# Altium PCB carte.PcbDoc
Units mm, origin at the board's own origin, x right, y up, seen from the top; angles counter-clockwise.
Board outline 100 x 72 mm, 2 copper layers (Top Layer, Bottom Layer); 52 components, 29 nets, 111 pads, 0 vias.
Unrouted connection lines stored in the file: 53.
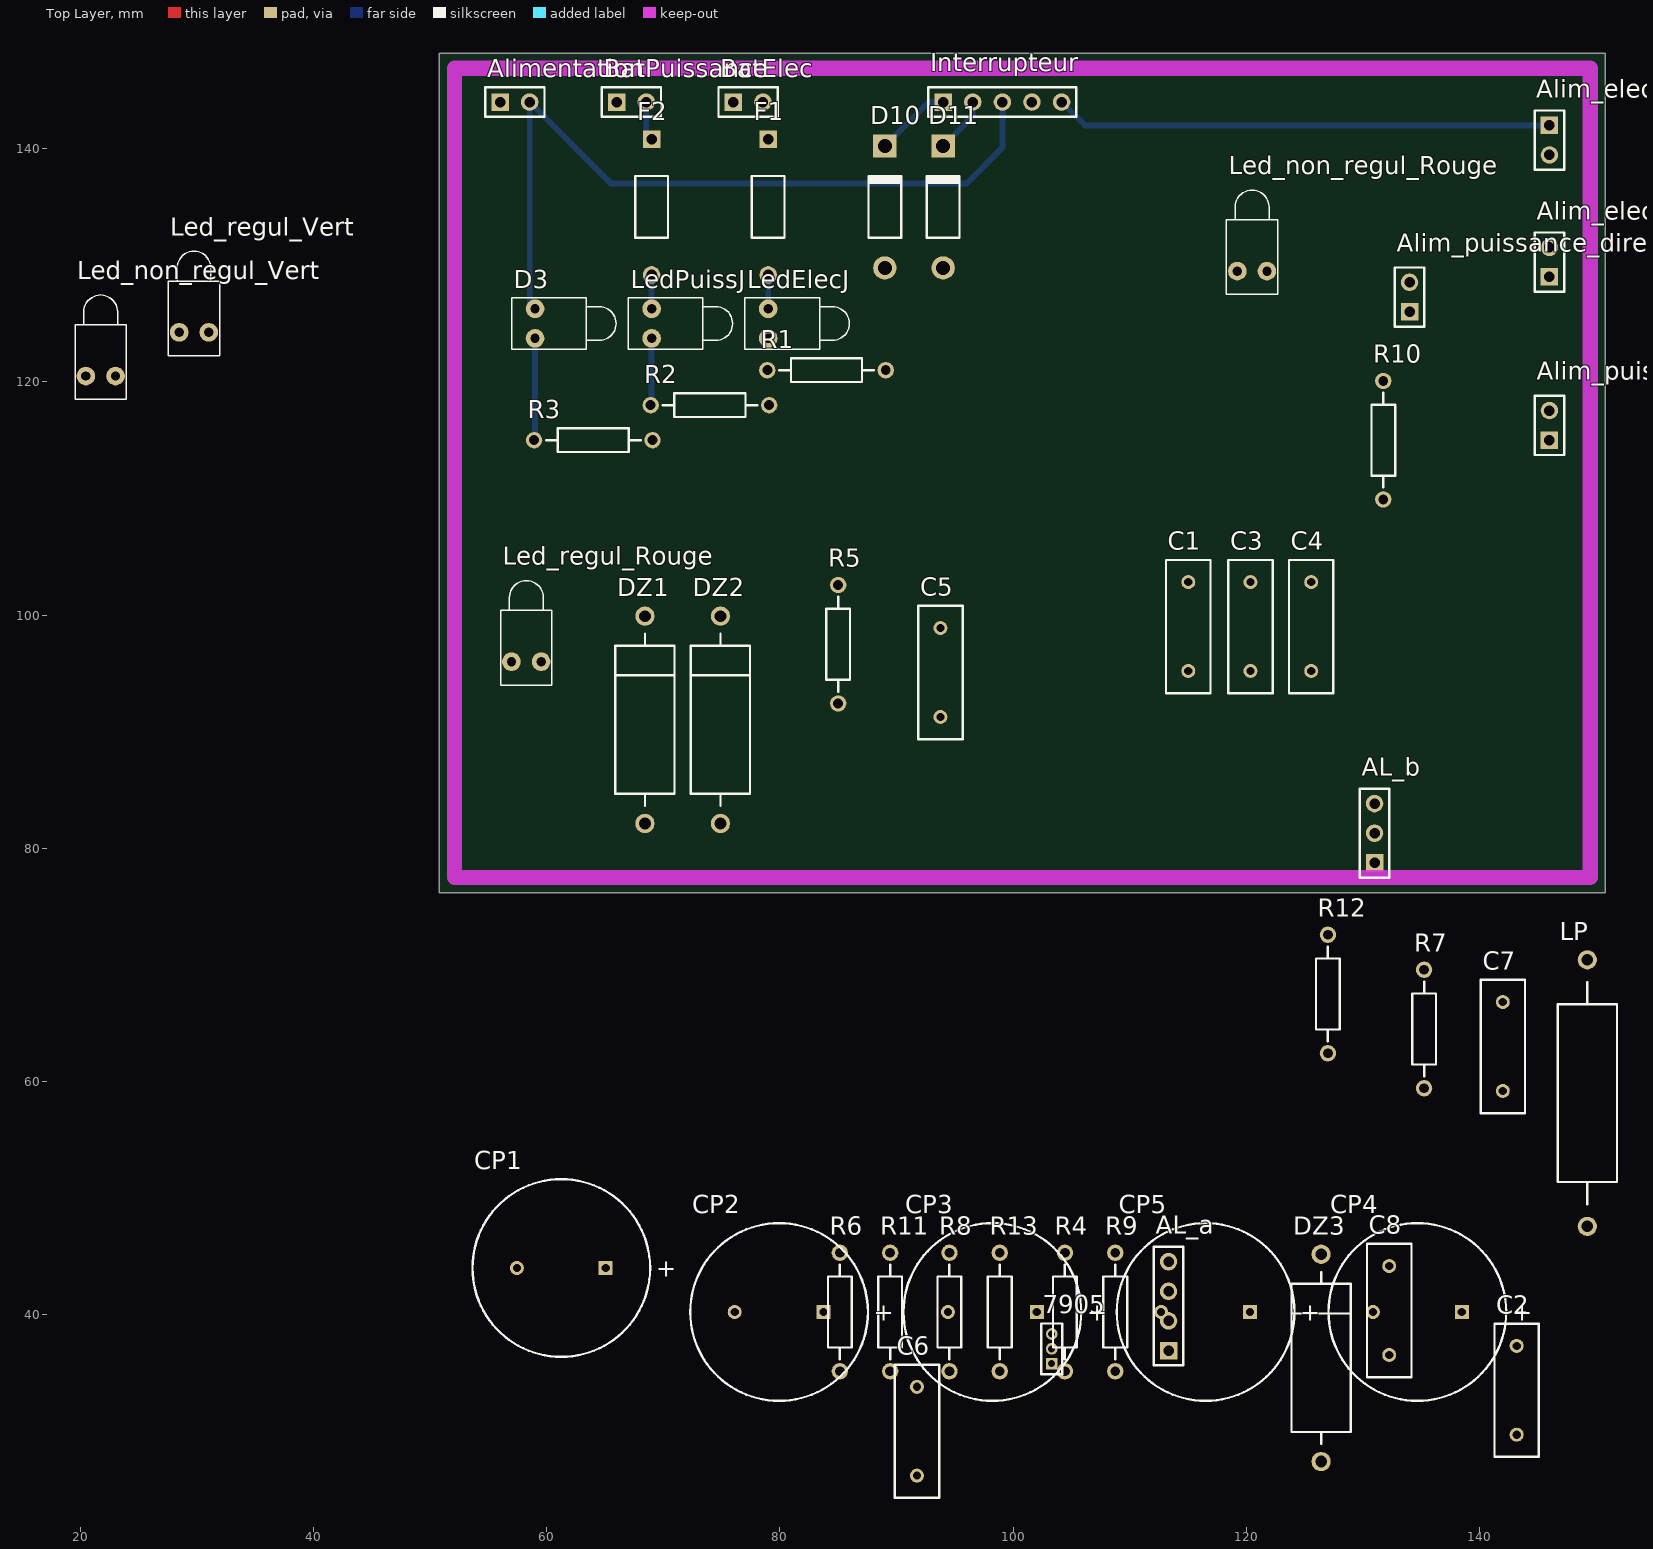
[diagram p0: Top Layer view]
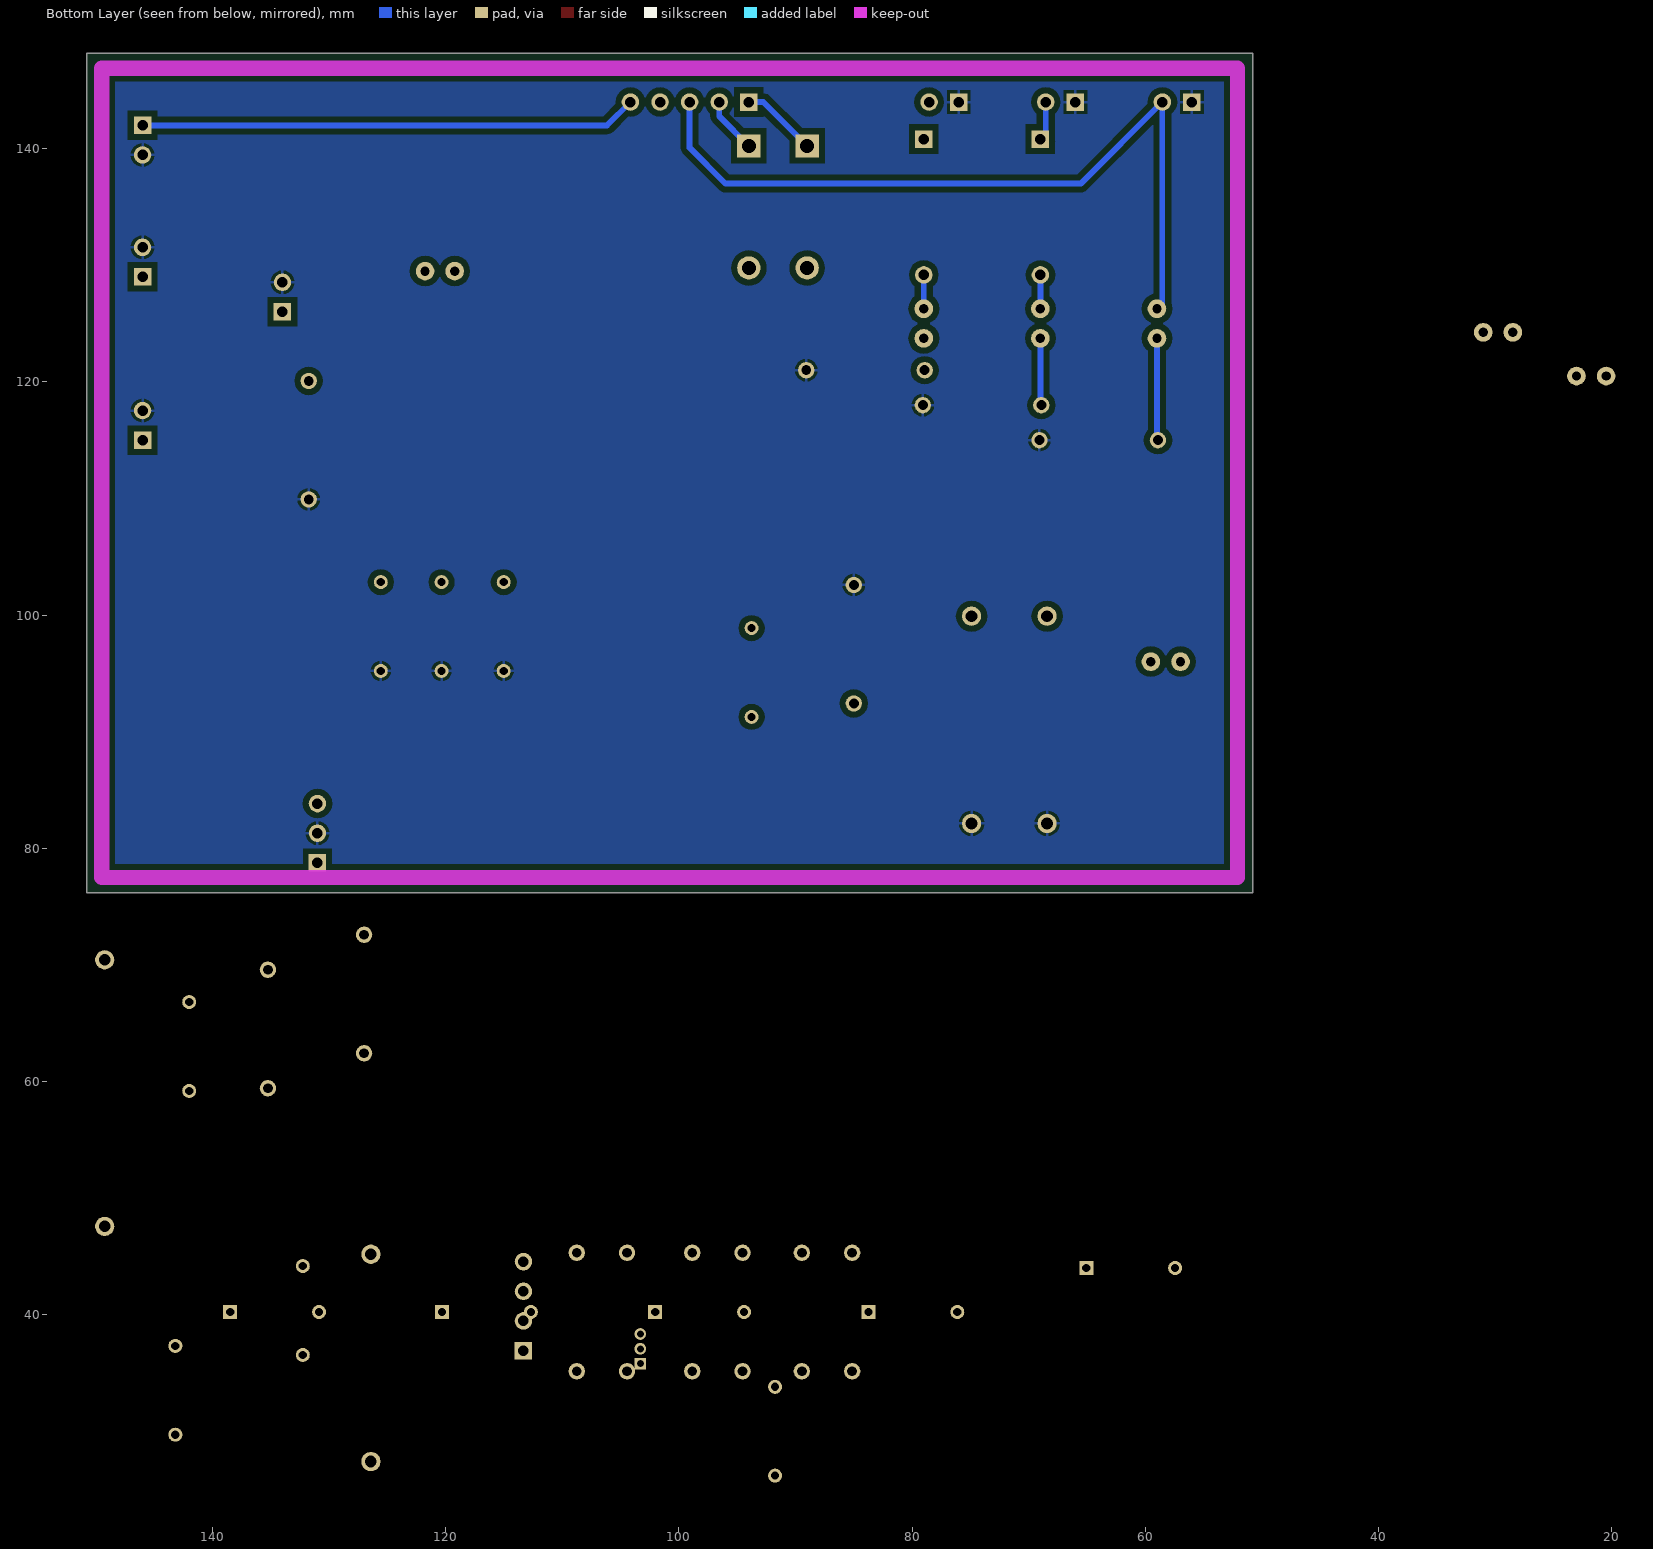
[diagram p1: Bottom Layer view, seen from below]

## Layer stack, top to bottom
Top Solder: solder mask 0.0102, Solder Resist, Dk 3.5
Top Layer: signal copper 0.0356
Dielectric 1: dielectric 0.32, FR-4, Dk 4.8
Bottom Layer: signal copper 0.0356
Bottom Solder: solder mask 0.0102, Solder Resist, Dk 3.5

## Board outline
50.8,76.2 150.8,76.2 150.8,148.2 50.8,148.2

## Design rules (kind name [scope] priority, off if disabled: settings)
Clearance [All] p1: gap=0.5
PolygonConnect [All] p1: connectstyle=Relief reliefconductorwidth=0.254 reliefentries=4 polygonreliefangle="90 Angle" airgapwidth=0.254
RoomDefinition carte [InComponentClass('carte')] p1: confinementstyle=ConfineIn formatcopy=TRUE lockcomponents=FALSE outline 0,0 50.8,0 50.8,25.4 0,25.4
RoutingVias [All] p1: holewidth=0.8 width=1.3 viastyle="Through Hole" minholewidth=0.711 minwidth=1.27 maxholewidth=0.711 maxwidth=1.27
SolderMaskExpansion [All] p1: expansion=0.102
UnpouredPolygon [All] p1: allowunpoured=FALSE
Width [All] p1: maxlimit=0.5 minlimit=0.5 preferedwidth=0.5
29 further rules are at their usual default settings.

## Classes and differential pairs
component class carte: U2

## Components (designator, comment, footprint, x,y, rotation, side; value= is the part's Value field where it differs from the comment)
7905 "7905" MHDR1X3 103.313,35.8 r90 top
AL_a "Header 4" HDR1X4 113.335,36.924 r90 top
AL_b "Header 3" HDR1X3 131,78.75 r90 top
Alim_elec_directe "Header 2" HDR1X2 146,142 r270 top
Alim_elec_stabilisee "Header 2" HDR1X2 146,129 r90 top
Alim_puissance_directe "Header 2" HDR1X2 134,126 r90 top
Alim_puissance_stabilisee "Header 2" HDR1X2 146,115 r90 top
Alimentation "Header 2" HDR1X2 56,144 r0 top
BatElec "Header 2" HDR1X2 76,144 r0 top
BatPuissance "Header 2" HDR1X2 66,144 r0 top
C1 "Cap" RAD-0.3 115.026,99.014 r90 top
C2 "Cap" RAD-0.3 143.191,33.514 r90 top
C3 "Cap" RAD-0.3 120.36,99.014 r90 top
C4 "Cap" RAD-0.3 125.567,99.014 r90 top
C5 "Cap" RAD-0.3 93.765,95.072 r90 top
C6 "Cap" RAD-0.3 91.75,30 r90 top
C7 "Cap" RAD-0.3 142,63 r90 top
C8 "Cap" RAD-0.3 132.258,40.353 r90 top
CP1 "Cap Pol1" RB7.6-15 61.25,44 r0 top
CP2 "Cap Pol1" RB7.6-15 79.934,40.226 r0 top
CP3 "Cap Pol1" RB7.6-15 98.222,40.226 r0 top
CP4 "Cap Pol1" RB7.6-15 134.671,40.226 r0 top
CP5 "Cap Pol1" RB7.6-15 116.51,40.226 r0 top
D3 "LedAlimJ" LED-1 59,125 r0 top
D10 "Diode 1N4001" DO-41 89,135 r90 top
D11 "Diode 1N4001" DO-41 94,135 r90 top
DZ1 "D Zener" DIODE-0.7 68.425,91.017 r90 top
DZ2 "D Zener" DIODE-0.7 74.902,91.017 r90 top
DZ3 "D Zener" DIODE-0.7 126.416,36.289 r90 top
F1 "Fuse 2" PIN-W2/E2.8 79,135 r270 top
F2 "Fuse 2" PIN-W2/E2.8 69,135 r270 top
Interrupteur "Header 5" HDR1X5 94,144 r0 top
Led_non_regul_Rouge "LED1" LED-1 120.5,129.5 r90 top
Led_non_regul_Vert "LED1" LED-1 21.75,120.5 r90 top
Led_regul_Rouge "LED1" LED-1 58.25,96 r90 top
Led_regul_Vert "LED1" LED-1 29.75,124.25 r90 top
LedElecJ "LED1" LED-1 79,125 r0 top
LedPuissJ "LED1" LED-1 69,125 r0 top
LP "Inductor" AXIAL-0.9 149.25,59 r90 top
R1 "Res2" AXIAL-0.4 84,121 r0 top
R2 "Res2" AXIAL-0.4 74,118 r0 top
R3 "Res2" AXIAL-0.4 64,115 r0 top
R4 "Res2" AXIAL-0.4 104.445,40.226 r90 top
R5 "Res2" AXIAL-0.4 85,97.5 r270 top
R6 "Res2" AXIAL-0.4 85.141,40.226 r90 top
R7 "Res2" AXIAL-0.4 135.25,64.5 r90 top
R8 "Res2" AXIAL-0.4 94.539,40.226 r90 top
R9 "Res2" AXIAL-0.4 108.763,40.226 r90 top
R10 "Res2" AXIAL-0.4 131.75,115 r90 top
R11 "Res2" AXIAL-0.4 89.459,40.226 r90 top
R12 "Res2" AXIAL-0.4 127,67.5 r90 top
R13 "Res2" AXIAL-0.4 98.857,40.226 r90 top

## Footprints (in the part's own frame and the unit in brackets; to place one, negate y for a bottom-side part, rotate by r counter-clockwise, add the part's x,y. Pads: shape width x height; smd on the part's side, far side on the other; paste and mask are expansions set on the pad)
AXIAL-0.4 [mm] "Axial Device, Thru-Hole; 2 Leads; 0.4 in Pin Spacing"
  round 1.4 hole 0.85: 1(-5.08,0) 2(5.08,0)
  silkscreen extent -4.06,-1.02 4.06,1.02
AXIAL-0.9 [mm] "Axial Device, Thru-Hole; 2 Leads; 0.9 in Pin Spacing"
  round 1.65 hole 1: 1(-11.43,0) 2(11.43,0)
  silkscreen extent -9.53,-2.54 9.52,2.54
DIODE-0.7 [mm] "Diode, Thru-Hole; 2 Leads; 0.7 in Pin Spacing"
  round 1.65 hole 1: 1(-8.89,0) 2(8.89,0)
  silkscreen extent -7.37,-2.54 7.37,2.54
DO-41 [mm] "Diode, Axial; Body 5.2 x 2.7 mm (LxDia. max), Lead Dia. 0.86 mm (max)"
  round 2 hole 1.2: 1(-5.23,0)
  rect 2x2 hole 1.2: 2(5.23,0)
  silkscreen extent -2.65,-1.4 2.75,1.4
HDR1X2 [mm] "Connector; Header; 2 Position"
  rect 1.5x1.5 hole 0.9: 1(0,0)
  round 1.5 hole 0.9: 2(2.54,0)
  silkscreen extent -1.27,-1.27 3.81,1.27
HDR1X3 [mm] "Connector; Header; 3 Position"
  rect 1.5x1.5 hole 0.9: 1(0,0)
  round 1.5 hole 0.9: 2(2.54,0) 3(5.08,0)
  silkscreen extent -1.27,-1.27 6.35,1.27
HDR1X4 [mm] "Connector; Header; 4 Position"
  rect 1.5x1.5 hole 0.9: 1(0,0)
  round 1.5 hole 0.9: 2(2.54,0) 3(5.08,0) 4(7.62,0)
  silkscreen extent -1.27,-1.27 8.89,1.27
HDR1X5 [mm] "Connector; Header; 5 Position"
  rect 1.5x1.5 hole 0.9: 1(0,0)
  round 1.5 hole 0.9: 2(2.54,0) 3(5.08,0) 4(7.62,0) 5(10.16,0)
  silkscreen extent -1.27,-1.27 11.43,1.27
LED-1 [mm] "LED; 2 Leads"
  round 1.6 hole 0.8: 1(0,1.27) 2(0,-1.27)
  silkscreen extent -2,-2.2 6.95,2.2
MHDR1X3 [mm] "Connector; Header; 3 Position"
  rect 1x1 hole 0.6: 1(0,0)
  round 1 hole 0.6: 2(1.27,0) 3(2.54,0)
  silkscreen extent -0.9,-0.9 3.44,0.9
PIN-W2/E2.8 [mm] "Thru-Hole; 2 Leads"
  rect 1.5x1.5 hole 0.9: 1(-5.825,0)
  round 1.5 hole 0.9: 2(5.825,0)
  silkscreen extent -2.65,-1.4 2.65,1.4
RAD-0.3 [mm] "Radial Cap, Thru-Hole; 2 Leads; 0.3 in Pin Spacing"
  round 1.2 hole 0.7: 1(-3.81,0) 2(3.81,0)
  silkscreen extent -5.72,-1.9 5.71,1.91
RB7.6-15 [mm] "Polarized Capacitor (Radial); 2 Leads"
  rect 1.2x1.2 hole 0.7: 1(3.81,0)
  round 1.2 hole 0.7: 2(-3.81,0)
  silkscreen extent -7.62,-7.62 7.62,7.62

## Part data
7905: library part MHDR1X3, "Header, 3-Pin"
AL_a: "Header, 4-Pin"
AL_b: "Header, 3-Pin"
Alim_elec_directe Alim_elec_stabilisee Alim_puissance_directe Alim_puissance_stabilisee Alimentation BatElec BatPuissance: "Header, 2-Pin"
C1 C2 C3 C4 C5 C6 C7 C8: "Capacitor"
CP1 CP2 CP3 CP4 CP5: "Polarized Capacitor (Radial)"
D3: library part LED1, "Typical RED GaAs LED"
D10 D11: "1 Amp General Purpose Rectifier"
DZ1 DZ2 DZ3: "Zener Diode"
F1 F2: "Fuse"
Interrupteur: "Header, 5-Pin"
Led_non_regul_Rouge Led_non_regul_Vert Led_regul_Rouge Led_regul_Vert LedElecJ LedPuissJ: "Typical RED GaAs LED"
LP: library part "Inductor Iron", "Magnetic-Core Inductor"
R1 R2 R3 R4 R5 R6 R7 R8 R9 R10 R11 R12 R13: "Resistor"

## Nets (pads, with @x,y where several pads share a name; then routed paths per layer and width w, separated by ;. In a path a pad name is that pad's centre, name@x,y a point inside that pad or via, vN(x,y) a via of type N, cw(c..) or ccw(c..) an arc to the next point about the centre after c; other vN are vias at no path point)
GND: 7905.2 AL_b.2 Alim_elec_directe.2 Alim_elec_stabilisee.2 Alim_puissance_directe.2 Alim_puissance_stabilisee.2 Alimentation.1 BatElec.1 BatPuissance.1 C1.1 C2.2 C3.1 C4.1 C6.1 C7.1 C8.1 CP1.2 CP2.2 CP3.2 CP4.2 CP5.2 DZ1.1 DZ2.1 DZ3.1 R1.2 R2.2 R3.2 R5.1 R6.2 R7.2 R10.1 R11.2 R12.2
Net7905_1: 7905.1 Alim_elec_directe.1 C1.2 C2.1 Interrupteur.5 | length 42.7
  Bottom Layer w0.5: Interrupteur.5 106.16,142 Alim_elec_directe.1
Net7905_3: 7905.3 Alim_elec_stabilisee.1 C3.2 C4.2
NetAL_a_3: AL_a.3 C5.2
NetAL_a_4: AL_a.4 C5.1 DZ3.2 LP.1
NetAlimentation_2: Alimentation.2 D3.1 Interrupteur.3 | length 66.6
  Bottom Layer w0.5: D3.1 58.54,126.73 Alimentation.2 65.54,137 96,137 99.08,140.08 Interrupteur.3
NetBatElec_2: BatElec.2 F1.1
NetBatPuissance_2: BatPuissance.2 F2.1 | length 3.7
  Bottom Layer w0.5: F2.1@68.5,140.575 68.54,140.615 BatPuissance.2@68.54,144.25
NetD3_2: D3.2 R3.1 | length 8.8
  Bottom Layer w0.5: R3.1 59,115.08 D3.2
NetD10_1: D10.1 F1.2 LedElecJ.1 | length 2.9
  Bottom Layer w0.5: LedElecJ.1 F1.2
NetD10_2: D10.2 Interrupteur.1 | length 6.6
  Bottom Layer w0.5: D10.2 92.77,144 Interrupteur.1
NetD11_1: D11.1 F2.2 LedPuissJ.1 | length 2.9
  Bottom Layer w0.5: LedPuissJ.1 F2.2
NetD11_2: D11.2 Interrupteur.2 | length 4.8
  Bottom Layer w0.5: D11.2 96.54,142.77 Interrupteur.2
NetDZ1_2: DZ1.2 R8.1
NetDZ2_2: DZ2.2 R13.1
NetLed_non_regul_Rouge_1: Led_non_regul_Rouge.1
NetLed_non_regul_Rouge_2: Led_non_regul_Rouge.2 R7.1
NetLed_non_regul_Vert_1: Led_non_regul_Vert.1
NetLed_non_regul_Vert_2: Led_non_regul_Vert.2 R6.1
NetLed_regul_Rouge_1: Led_regul_Rouge.1
NetLed_regul_Rouge_2: Led_regul_Rouge.2 R12.1
NetLed_regul_Vert_1: Led_regul_Vert.1
NetLed_regul_Vert_2: Led_regul_Vert.2 R11.1
NetLedElecJ_2: LedElecJ.2 R1.1
NetLedPuissJ_2: LedPuissJ.2 R2.1 | length 5.8
  Bottom Layer w0.5: R2.1 69,118.08 LedPuissJ.2
NetR4_2: R4.2 R5.2
NetR9_2: R9.2 R10.2
PUISS_NON_REGULEE: AL_a.1 AL_b.1 Alim_puissance_directe.1 C6.2 C7.2 CP1.1 CP2.1 CP3.1 Interrupteur.4 R4.1 R8.2 R9.1
PUISS_REGULEE: Alim_puissance_stabilisee.1 C8.2 CP4.1 CP5.1 LP.2 R13.2
pads on no net: AL_a.2 AL_b.3

## Polygon pours and split planes (outlines as drawn)
GND on Bottom Layer "Top Layer-No Net" (solid, pour order 4): 52.1,146.9 149.5,146.9 149.5,78.25 148.75,77.5 148.25,78 52.1,78 52.25,78 52.75,77.5
GND on Bottom Layer "Top Layer-No Net" (solid, pour order 2): 52.1,146.9 149,146.9 149.5,146.4 149.5,78 52,78 52.1,78

## Keep-outs
Keep-Out Layer:
  lines w1.3: 52.1,77.5 52.1,146.9 149.5,146.9 149.5,77.5 52.1,77.5

## Silkscreen, mask and mechanical layers (free items; w line width, h text height)
Drill Drawing:
  text ".LEGEND" at 62.586,39.21 h1.52
  text "Drill Drawing." at 62.586,36.67 h1.52

## Dimensions
52.1,77.5 to 52.1,146.9 on Mechanical 1
52.1,77.5 to 149.5,77.5 on Mechanical 1

## Text inside footprints (layer, text, board x,y; h text height)
CP1: Top Overlay "+" at 69.382,43.263 h1.5
CP2: Top Overlay "+" at 88.066,39.489 h1.5
CP3: Top Overlay "+" at 106.354,39.489 h1.5
CP4: Top Overlay "+" at 142.803,39.489 h1.5
CP5: Top Overlay "+" at 124.642,39.489 h1.5